# Altium PCB 自平衡小车PCB.PcbDoc
Units mm, origin at the board's own origin, x right, y up, seen from the top; angles counter-clockwise.
Board outline 79.99 x 66.7 mm, 2 copper layers (Top Layer, Bottom Layer); 51 components, 52 nets, 216 pads, 43 vias.
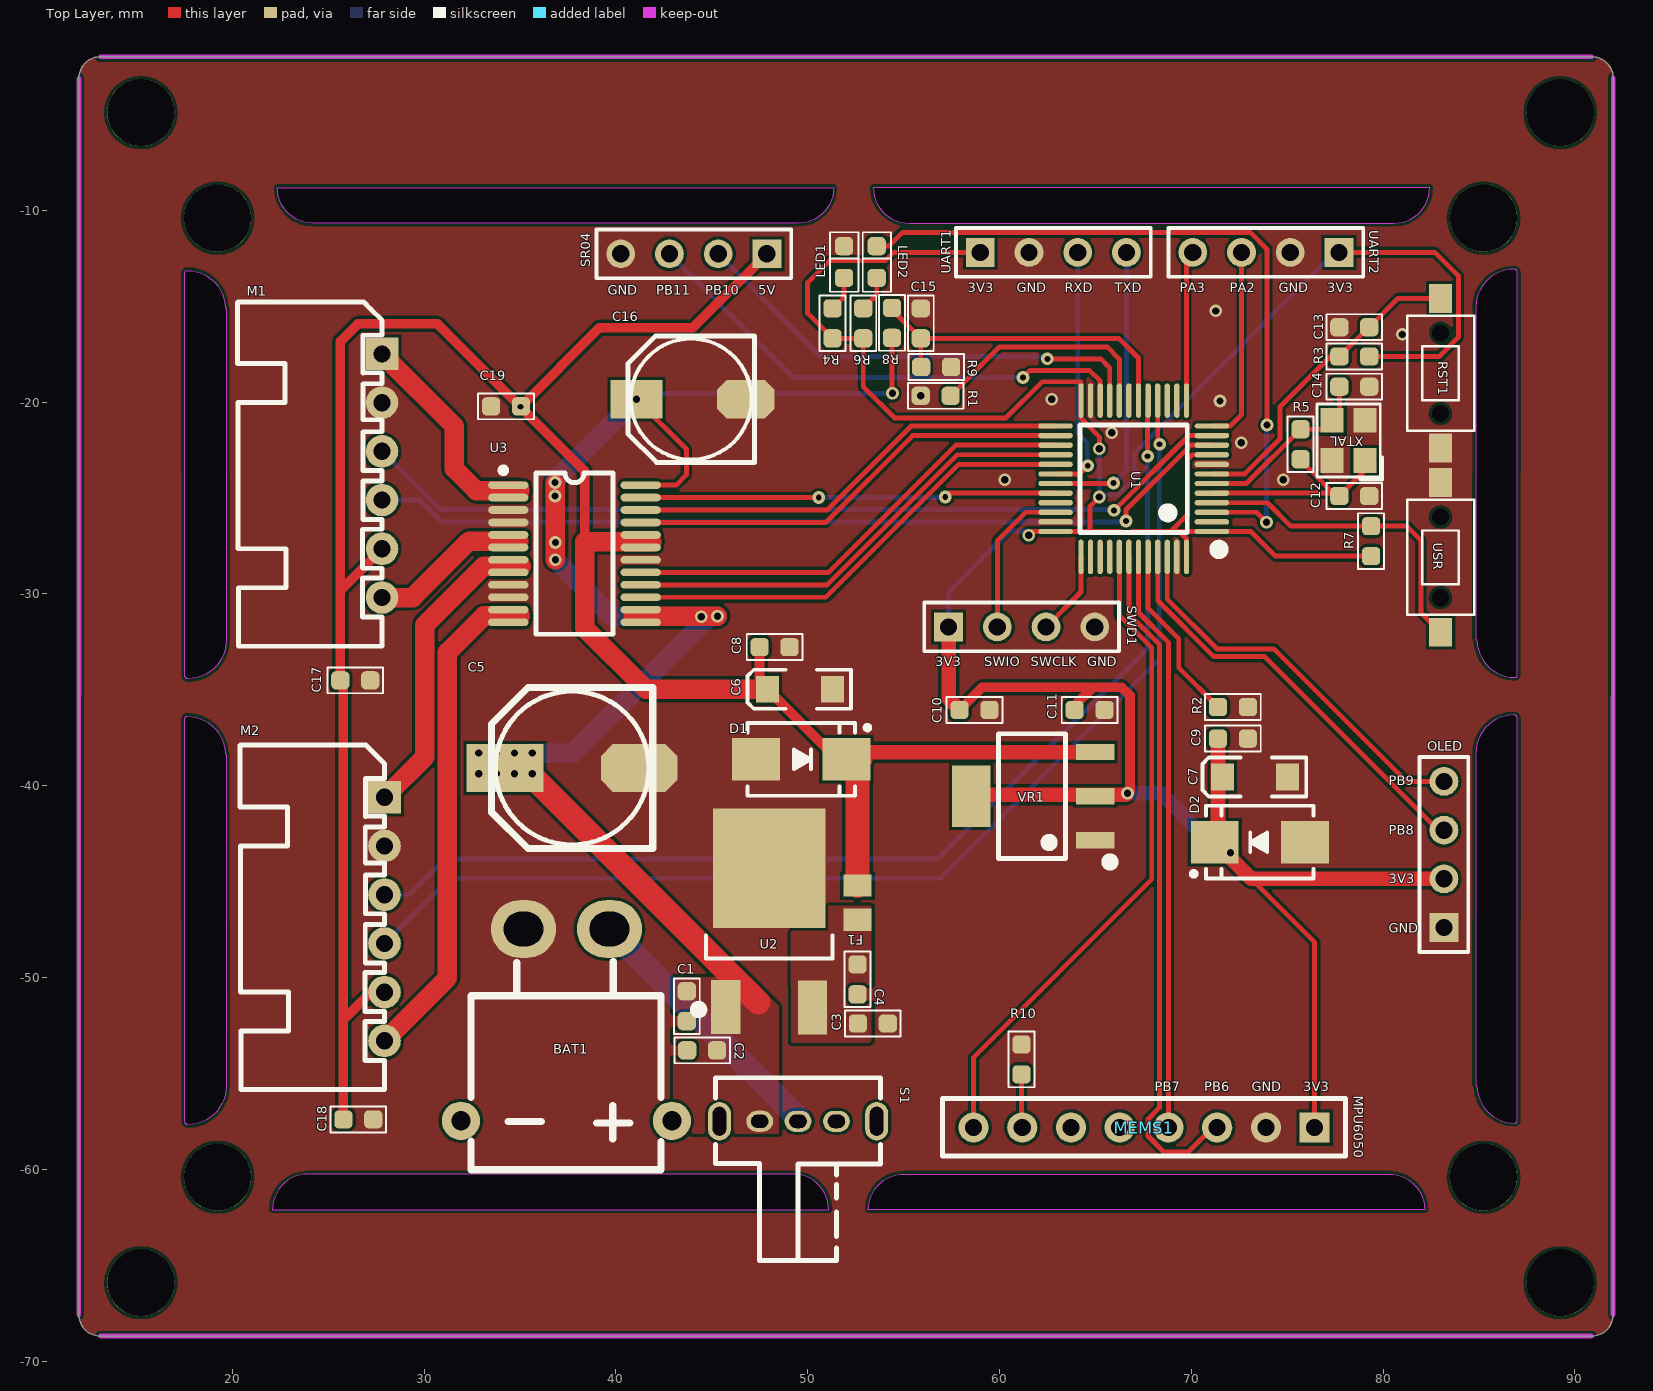
[diagram p0: Top Layer view]
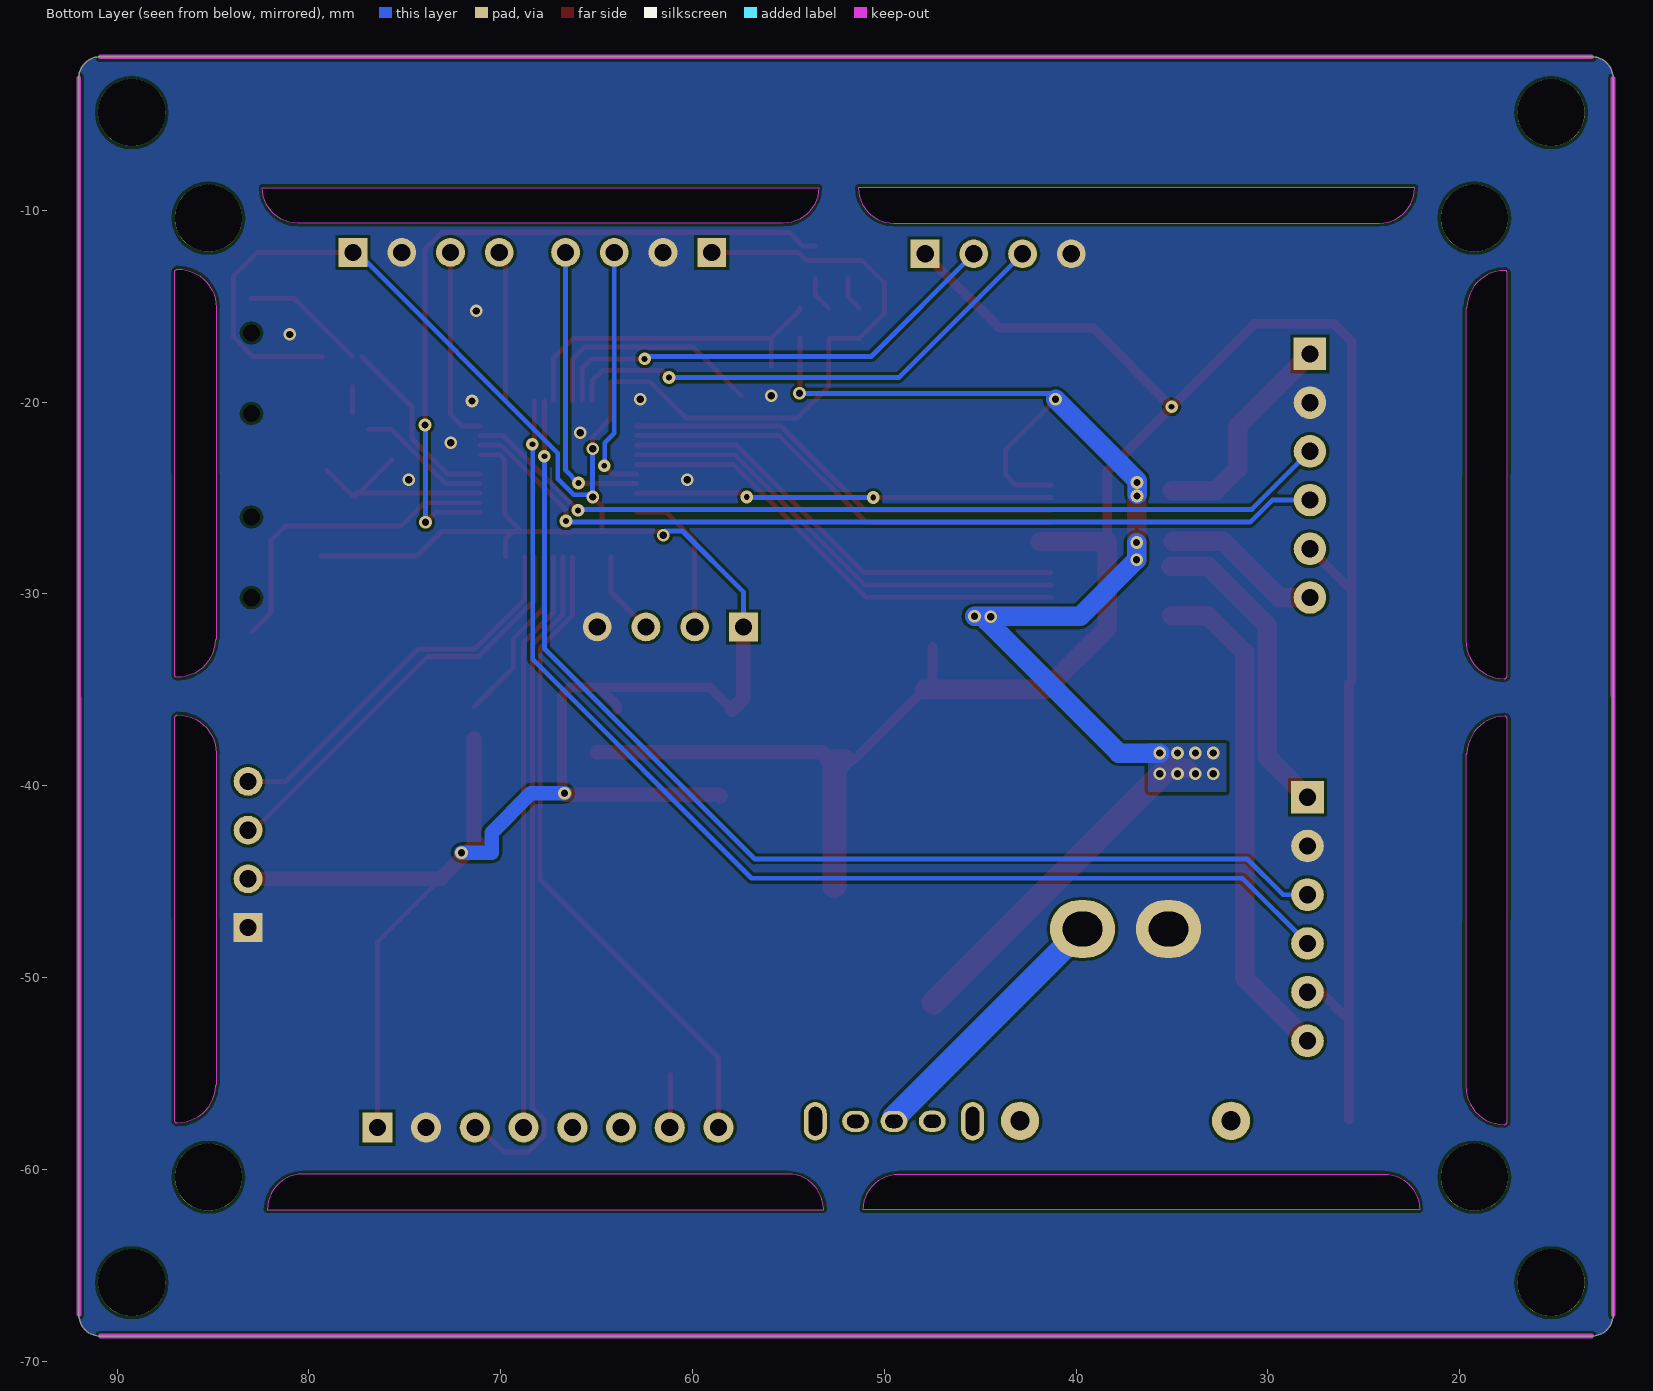
[diagram p1: Bottom Layer view, seen from below]
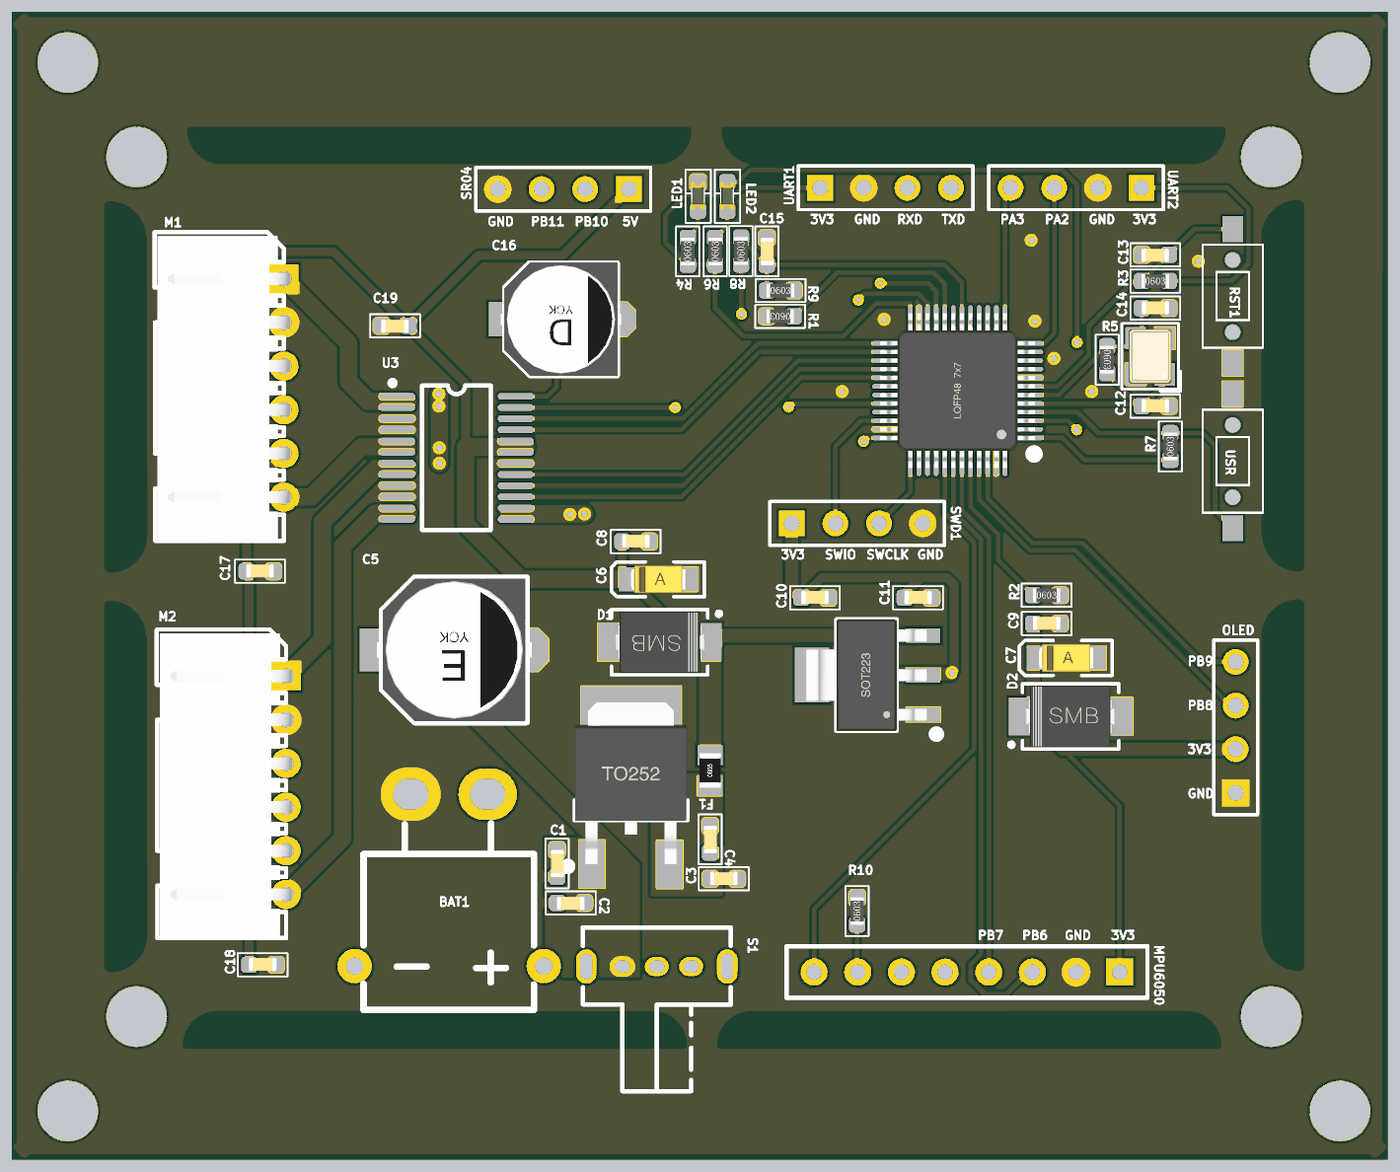
[diagram p2: 3D render of the assembled board from above, using the file's embedded part models]

## Layer stack, top to bottom
Top Solder: solder mask 0.0102, Solder Resist, Dk 3.5
Top Layer: signal copper 0.0356
Dielectric 1: dielectric 0.32, FR-4, Dk 4.8
Bottom Layer: signal copper 0.0356
Bottom Solder: solder mask 0.0102, Solder Resist, Dk 3.5

## Board outline
12.007,-67.582 ccw(c13.125,-67.582) 13.125,-68.7 90.875,-68.7 ccw(c90.875,-67.582) 91.993,-67.582 92,-3.1 92,-3.118 ccw(c90.882,-3.118) 90.882,-2 13.125,-2 ccw(c13.125,-3.118) 12.007,-3.118
cut-out: 22.098,-62.103 51.098,-62.103 ccw(c49.25,-62.103) 49.25,-60.255 23.946,-60.255 ccw(c23.946,-62.103)
cut-out: 53.173,-62.103 cw(c55.021,-62.103) 55.021,-60.255 80.325,-60.255 cw(c80.325,-62.103) 82.173,-62.103
cut-out: 84.831,-32.318 ccw(c84.959,-32.318) 84.893,-32.427 ccw(c86.868,-32.379) 86.868,-34.354 ccw(c86.868,-34.227) 86.995,-34.227 86.995,-13.227 ccw(c86.868,-13.227) 86.942,-13.123 ccw(c86.839,-13.198) 86.839,-13.07 ccw(c86.839,-15.078) 84.831,-15.078
cut-out: 84.831,-55.559 ccw(c84.959,-55.559) 84.893,-55.668 ccw(c86.868,-55.62) 86.868,-57.595 ccw(c86.868,-57.468) 86.995,-57.468 86.995,-36.468 ccw(c86.868,-36.468) 86.942,-36.364 ccw(c86.839,-36.439) 86.839,-36.311 ccw(c86.839,-38.319) 84.831,-38.319
cut-out: 17.579,-34.375 cw(c17.653,-34.271) 17.526,-34.271 17.526,-13.271 cw(c17.653,-13.271) 17.653,-13.144 cw(c17.653,-15.119) 19.628,-15.071 cw(c19.562,-15.18) 19.69,-15.18 19.69,-32.42 cw(c17.682,-32.42) 17.682,-34.428 cw(c17.682,-34.3)
cut-out: 17.579,-57.616 cw(c17.653,-57.512) 17.526,-57.512 17.526,-36.512 cw(c17.653,-36.512) 17.653,-36.385 cw(c17.653,-38.36) 19.628,-38.312 cw(c19.562,-38.421) 19.69,-38.421 19.69,-55.661 cw(c17.682,-55.661) 17.682,-57.669 cw(c17.682,-57.541)
cut-out: 53.427,-8.822 ccw(c55.275,-8.822) 55.275,-10.67 80.579,-10.67 ccw(c80.579,-8.822) 82.427,-8.822
cut-out: 24.2,-10.67 cw(c24.2,-8.822) 22.352,-8.822 51.352,-8.822 cw(c49.504,-8.822) 49.504,-10.67

## Design rules (kind name [scope] priority, off if disabled: settings)
Clearance [All] p1: gap=0.152
ComponentClearance [All] p1: gap=0.02 collisioncheckmode=3 verticalgap=0.254 showdistances=TRUE
HoleSize [All] p1: absolutevalues=TRUE maxlimit=20 minlimit=0.152 maxpercent=80.000 minpercent=20.000
HoleToHoleClearance [All] p1: gap=0.152 allowstackedmicrovias=TRUE
MinimumSolderMaskSliver [All] p1: minsoldermaskwidth=0.01
PlaneClearance [All] p1: clearance=0.152
PlaneConnect [All] p1: planeconnectstyle=Direct reliefexpansion=0.508 reliefentries=4 reliefconductorwidth=0.508 reliefairgap=0.254
PolygonConnect [All] p1: connectstyle=Direct reliefconductorwidth=0.508 reliefentries=4 polygonreliefangle="45 Angle" airgapwidth=0.254
RoutingVias [All] p1: holewidth=0.3 width=0.45 viastyle="Through Hole" minholewidth=0.3 minwidth=0.45 maxholewidth=20 maxwidth=30
SilkToBoardRegionClearance [All] p1 off:
SilkToSilkClearance [All] p1: silktosilkclearance=0.05
SilkToSolderMaskClearance [IsPad] p1: minsilkscreentomaskgap=0 clearancetoexposedcopper=FALSE
SolderMaskExpansion [All] p1: expansion=0.05
Width [All] p1: maxlimit=12.7 minlimit=0.152 preferedwidth=0.254
21 further rules are at their usual default settings.

## Components (designator, comment, footprint, x,y, rotation, side; value= is the part's Value field where it differs from the comment)
BAT1 "Header 2" XT30-PW-M 37.425,-47.475 r180 top
C1 "22uF" 0603_C_f 43.7,-51.5 r90 top
C2 "334" 0603_C_f 44.5,-53.8 r0 top
C3 "104" 0603_C_f 53.4,-52.4 r180 top
C4 "22uF" 0603_C_f 52.6,-50.1 r90 top
C5 "220uF 35V" "CM E(8*10.2)" 37.719,-39.082 r180 top
C6 "T22uF" "CD A(3216)" 49.6,-34.975 r0 top
C7 "T22uF" "CD A(3216)" 73.325,-39.55 r0 top
C8 "104" 0603_C_f 48.275,-32.775 r180 top
C9 "104" 0603_C_f 72.175,-37.55 r180 top
C10 "104" 0603_C_f 58.7,-36.05 r180 top
C11 "104" 0603_C_f 64.7,-36.05 r180 top
C12 "22pF" 0603_C_f 78.5,-24.9 r180 top
C13 "104" 0603_C_f 78.5,-16.1 r0 top
C14 "22pF" 0603_C_f 78.5,-19.2 r180 top
C15 "104" 0603_C_f 55.9,-15.9 r90 top
C16 "47uF" "CM D(6.3*7.7)" 43.925,-19.85 r180 top
C17 "104" 0603_C_f 26.416,-34.51 r180 top
C18 "104" 0603_C_f 26.575,-57.4 r180 top
C19 "104" 0603_C_f 34.275,-20.225 r0 top
D1 "KE" SMB 49.665,-38.629 r0 top
D2 "KC" SMB 73.575,-42.95 r180 top
F1 "F1" 0805_R 52.6,-46.1 r90 top
LED1 "LED" LED-0603_GREEN 51.9,-13.5 r90 top
LED2 "LED" LED-0603_GREEN 53.6,-13.5 r90 top
M1 "Header 6" XH2.54-WI-6P 27.813,-23.842 r270 top
M2 "Header 6" XH2.54-WI-6P 27.94,-46.956 r270 top
MEMS1 "MPU6050" MPU6050 58.65,-57.825 r270 top
OLED "Header 4" HDR1X4 83.175,-47.4 r90 top
R1 "10K" 0603_R_F 56.675,-19.675 r180 top
R2 "10K" 0603_R_F 72.175,-35.9 r0 top
R3 "10K" 0603_R_F 78.5,-17.625 r0 top
R4 "1K" 0603_R_F 51.3,-15.9 r90 top
R5 "1M" 0603_R_F 75.7,-22.2 r270 top
R6 "1K" 0603_R_F 52.9,-15.9 r90 top
R7 "10K" 0603_R_F 79.375,-27.25 r90 top
R8 "10K" 0603_R_F 54.4,-15.875 r90 top
R9 "1K" 0603_R_F 56.7,-18.175 r0 top
R10 "10K" 0603_R_F 61.15,-54.275 r90 top
RST1 "SW-PB" KEY 83,-18.5 r270 top
S1 "SW-SPDT" SW-TH_SK-12D02-VG5 49.5,-57.5 r0 top
SR04 "Header 4" HDR1X4 47.875,-12.275 r180 top
SWD1 "Header 4" HDR1X4 57.35,-31.725 r0 top
U1 "STM32F103C8T6" "LQFP48 7X7_N" 67,-24 r90 top
U2 "78L05" TO252 48,-48.5 r0 top
U3 "TB6612FNG" SSOP-24_208mil 37.846,-27.906 r270 top
UART1 "Header 4" HDR1X4 59,-12.2 r0 top
UART2 "Header 4" HDR1X4 77.7,-12.2 r180 top
USR "SW-PB" KEY 83,-28.1 r90 top
VR1 "AMS1117-3.3" SOT223_N 61.7,-40.55 r90 top
XTAL "XTAL-4P" "OSC 3225-4P" 78.2,-22 r90 top

## Footprints (in the part's own frame and the unit in brackets; to place one, negate y for a bottom-side part, rotate by r counter-clockwise, add the part's x,y. Pads: shape width x height; smd on the part's side, far side on the other; paste and mask are expansions set on the pad)
0603_C_f [mm]
  rrect50% 0.95x0.95 smd: 1(-0.78,0) 2(0.78,0)
  silkscreen extent -1.45,-0.67 1.45,0.67, body extent -0.82,-0.42 0.8,0.38, height 0.8
0603_R_F [mm]
  rrect50% 0.95x0.95 smd: 1(-0.78,0) 2(0.78,0)
  silkscreen extent -1.45,-0.67 1.45,0.67, body extent -0.8,-0.4 0.8,0.4, height 0.45
0805_R [mm]
  rect 1.16x1.47 smd: 1(-0.89,0) 2(0.89,0)
  body extent -1,-0.62 1,0.63, height 0.49
"CD A(3216)" [mm] "长3.2mm，宽1.6mm，厚1.6mm"
  rect 1.2x1.4 smd: 1(-1.7,0) 2(1.7,0)
  silkscreen extent -2.74,-1.02 2.67,1.02, body extent -1.6,-0.8 1.6,0.8, height 1.6
"CM D(6.3*7.7)" [mm] "贴片电解电容，直径6.3mm，高7.7mm"
  rect 2.7x2 smd: 1(2.85,0)
  oct 3x2 smd: 2(-2.85,0)
  silkscreen extent -3.3,-3.3 3.3,3.3, body extent -3.5,-3.3 3.5,3.3, height 7.7
"CM E(8*10.2)" [mm] "贴片电解电容，直径8mm，高10.2mm"
  rect 4x2.5 smd: 1(3.5,0)
  oct 4x2.5 smd: 2(-3.5,0)
  silkscreen extent -4.2,-4.2 4.2,4.2, body extent -4.5,-4.15 4.5,4.15, height 10.2
HDR1X4 [mm] "Connector; Header; 4 Position"
  rect 1.5x1.5 hole 0.9: 1(0,0)
  round 1.5 hole 0.9: 2(2.54,0) 3(5.08,0) 4(7.62,0)
  silkscreen extent -1.27,-1.27 8.89,1.27
KEY [mm]
  round 0 hole 0.9: 0(-2.1,0) 0(2.1,0)
  rect 1.5x1.2 smd: 1(-3.9,0) 2(3.9,0)
  silkscreen extent -3,-1.75 3,1.75
LED-0603_GREEN [mm]
  rrect50% 0.95x0.95 smd: 1(-0.03,0) 2(1.625,0)
  silkscreen extent -0.75,-0.75 2.35,0.72, body extent 0.02,-0.4 1.63,0.4, height 0.6
"LQFP48 7X7_N" [mm] "48脚，体宽7x7mm，脚距0.5mm"
  oval 0.279x1.8 smd: 1(-2.75,-4.075) 2(-2.25,-4.075) 3(-1.75,-4.075) 4(-1.25,-4.075) 5(-0.75,-4.075) 6(-0.25,-4.075) 7(0.25,-4.075) 8(0.75,-4.075) 9(1.25,-4.075) 10(1.75,-4.075) 11(2.25,-4.075) 12(2.75,-4.075) 25(2.75,4.075) 26(2.25,4.075) 27(1.75,4.075) 28(1.25,4.075) 29(0.75,4.075) 30(0.25,4.075) 31(-0.25,4.075) 32(-0.75,4.075) 33(-1.25,4.075) 34(-1.75,4.075) 35(-2.25,4.075) 36(-2.75,4.075)
  oval 1.8x0.279 smd: 13(4.075,-2.75) 14(4.075,-2.25) 15(4.075,-1.75) 16(4.075,-1.25) 17(4.075,-0.75) 18(4.075,-0.25) 19(4.075,0.25) 20(4.075,0.75) 21(4.075,1.25) 22(4.075,1.75) 23(4.075,2.25) 24(4.075,2.75) 37(-4.075,2.75) 38(-4.075,2.25) 39(-4.075,1.75) 40(-4.075,1.25) 41(-4.075,0.75) 42(-4.075,0.25) 43(-4.075,-0.25) 44(-4.075,-0.75) 45(-4.075,-1.25) 46(-4.075,-1.75) 47(-4.075,-2.25) 48(-4.075,-2.75)
  silkscreen extent -3.93,-4.69 2.79,2.79, body extent -4.5,-4.5 4.5,4.5, height 1.45
MPU6050 [mil]
  rect 62x62 hole 35: 1(0,700)
  round 62 hole 35: 2(0,600) 3(0,500) 4(0,400) 5(0,300) 6(0,200) 7(0,100) 8(0,0)
  silkscreen extent -59,-63 59,763
"OSC 3225-4P" [mm] "3.2*2.5*0.7mm(长宽高)"
  rect 1.3x1.2 smd: 1(-1.05,-0.85) 2(1.05,-0.85) 3(1.05,0.85) 4(-1.05,0.85)
  silkscreen extent -2.03,-1.75 1.91,1.65, body extent -1.6,-1.25 1.6,1.25, height 0.7
SMB [mm] "4.7*3.9*2.2mm(长宽高，不包括引脚）"
  rect 2.5x2.2 smd: 1(-2.35,0) 2(2.35,0)
  silkscreen extent -2.8,-1.9 3.58,1.9, body extent -2.63,-1.8 2.67,1.8, height 2.35
SOT223_N [mm] "6.4x7x1.6mm(长宽高)"
  rect 0.85x2 smd: 1(-2.3,-3.302) 2(0,-3.302) 3(2.3,-3.302)
  rect 3.2x2 smd: 2(0,3.175)
  silkscreen extent -3.63,-4.26 3.25,1.75, body extent -3.25,-3.51 3.25,3.51, height 1.65
SSOP-24_208mil [mm]
  oval 0.4x2.1 smd mask+0.051: 1(-3.575,-3.45) 2(-2.925,-3.45) 3(-2.275,-3.45) 4(-1.625,-3.45) 5(-0.975,-3.45) 6(-0.325,-3.45) 7(0.325,-3.45) 8(0.975,-3.45) 9(1.625,-3.45) 10(2.275,-3.45) 11(2.925,-3.45) 12(3.575,-3.45) 13(3.575,3.45) 14(2.925,3.45) 15(2.275,3.45) 16(1.625,3.45) 17(0.975,3.45) 18(0.325,3.45) 19(-0.325,3.45) 20(-0.975,3.45) 21(-1.625,3.45) 22(-2.275,3.45) 23(-2.925,3.45) 24(-3.575,3.45)
  silkscreen extent -4.5,-3.86 4.2,2
SW-TH_SK-12D02-VG5 [mm]
  oval 1.4x1.1 hole 0.7 slot 0.9 at 0 deg: 1(-2,0.001) 2(0,0) 3(2,-0.001)
  oval 1.2x2 hole 0.7 slot 1.5 at 90 deg: 4(4.1,0) 5(-4.1,0)
  silkscreen extent -4.3,-7.25 4.3,2.27
TO252 [mil] "252晶体管"
  rect 60x110 smd: 1(-89.55,-119.77) 3(88.45,-120.77)
  rect 230x245 smd: 2(0,165.35)
  silkscreen extent -153,-133 130,28, body extent -128,-120 128,251, height 91
XH2.54-WI-6P [mm] "接插件，6P"
  rect 1.7x1.7 hole 0.9: 1(-6.35,0)
  round 1.7 hole 0.9: 2(-3.81,0) 3(-1.27,0) 4(1.27,0) 5(3.81,0) 6(6.35,0)
  silkscreen extent -9.07,-7.53 8.89,0, body extent -8.85,-7.35 8.85,0.35, height 5.75
XT30-PW-M [mm]
  round 2 hole 1: 0(-5.5,10) 0(5.5,10)
  oval 3.4x3 hole 1.8 slot 2.06 at 0 deg: 1(-2.24,0) 2(2.24,0)
  silkscreen extent -4.93,1.7 4.98,12.55, body extent -4.91,-0.11 5.07,12.6, height 5.3

## Part data
BAT1: "Header, 2-Pin"
C1 C4: library part "0805 22uF (226) 20% 25V", "贴片电容"
C2: library part "0603 100nF (104) 10% 50V_1", "贴片电容"
C3 C8 C9 C10 C11 C13 C15 C17 C18 C19: library part "0603 100nF (104) 10% 50V", "贴片电容"
C5: library part "Cap Pol1_1", "Polarized Capacitor (Radial)"
C6 C7: library part "Cap Pol1_2", "Polarized Capacitor (Radial)"
C12 C14: library part "0603 22pF (220) 5% 50V", "贴片电容"
C16: library part "Cap Pol1", "Polarized Capacitor (Radial)"
D1: library part Diode_1, "Default Diode"
D2: library part Diode_2, "Default Diode"
F1: library part "Fuse 2", "Fuse"
M1 M2: "Header, 6-Pin"
MEMS1: library part GY-521
OLED SR04 UART1 UART2: library part "Header 4_1", "Header, 4-Pin"
R1 R2 R3 R7 R8 R10: library part "0603 10KΩ (1002) 1%", "贴片电阻"
R4 R6 R9: library part "0603 1KΩ (1001) 1%", "贴片电阻"
R5: library part "0603 1MΩ (1004) 1%", "贴片电阻"
RST1 USR: "Switch"
S1: "SPDT Subminiature Toggle Switch, Right Angle Mounting, Vertical Actuation"
SWD1: "Header, 4-Pin"
U1: "ARM"
U2: "3-Terminal Positive Voltage Regulator"
VR1: library part "SOT-223 AMS1117-3.3", "低压差线性稳压(LDO)"

## Free pads (board coordinates)
  round 3.5 hole 3.5: ""(15.24,-65.913) ""(15.24,-4.913) ""(19.24,-60.413) ""(19.24,-10.413) ""(85.24,-60.413) ""(85.24,-10.413) ""(89.24,-65.913) ""(89.24,-4.913)

## Via types
v1: diameter 0.66, hole 0.381, Top Layer to Bottom Layer, 32 vias
v2: diameter 0.66, hole 0.305, Top Layer to Bottom Layer, 11 vias

## Nets (pads, with @x,y where several pads share a name; then routed paths per layer and width w, separated by ;. In a path a pad name is that pad's centre, name@x,y a point inside that pad or via, vN(x,y) a via of type N, cw(c..) or ccw(c..) an arc to the next point about the centre after c; other vN are vias at no path point)
3V3: C7.1 C9.2 C10.2 C11.2 D2.2 MEMS1.1 OLED.2 R3.2 R4.1 R6.1 R7.1 SWD1.1 U1.1 U1.9 U1.24 U1.36 U1.48 UART1.1 UART2.1 VR1.2 | length 173.1
  Top Layer w0.254: UART1.1 54.481,-12.2 54.052,-12.629 51.146,-12.629 50,-13.775 50,-15.38 R4.1 R6.1 52.9,-19.2 54.527,-20.827 60.342,-20.827 62.228,-18.941 64.25,-18.941 U1.24 64.25,-20.85 65.21,-21.81 v1(65.21,-22.44) ; v1(61.525,-26.95) 61.725,-26.75 U1.36 64.725,-26.75 ; v1(65.2,-24.95) 64.725,-25.425 64.725,-26.75 ; U1.48 69.75,-27.125 69.375,-26.75 ; U1.9 70.052,-22.75 69.8,-23.002 69.8,-25.875 68.925,-26.75 ; 73.135,-44.86 76.43,-48.155 MEMS1.1 ; UART2.1 82.7,-12.2 83.925,-13.425 83.925,-16.625 82.925,-17.625 R3.2 ; R7.1 74.38,-28.03 73.1,-26.75 U1.1 69.375,-26.75 ; 64.725,-26.75 66.288,-26.75 66.347,-26.81 66.853,-26.81 66.912,-26.75 68.925,-26.75 ; 68.925,-26.75 69.375,-26.75
  Top Layer w0.508: C10.2 59.095,-34.875 64.675,-34.875 ; C11.2 63.92,-35.83 64.875,-34.875 66.375,-34.875 66.8,-35.3 66.8,-40.275 v1@66.6,-40.475
  Top Layer w0.762: SWD1.1 57.35,-35.48 C10.2 ; VR1.2@58.525,-40.55 58.6,-40.475 v1@66.6,-40.475 ; D2.2 73.135,-44.86 OLED.2 ; D2.2@71.395,-42.78 C9.2
  Bottom Layer w0.254: SWD1.1 57.35,-29.9 60.525,-26.725 v1@61.425,-26.725 ; v1(65.2,-24.95) v1@65.21,-24.94 ; v1(65.21,-22.44) v1@65.21,-24.94 ; UART2.1 77.488,-12.2 67.026,-22.661 67.026,-24.011 66.203,-24.835 65.315,-24.835 v1@65.21,-24.94
  Bottom Layer w0.762: v1(66.675,-40.4) 68.425,-40.4 70.475,-42.45 70.475,-43.5 v1(72.05,-43.5)
5V: C6.1 C8.2 C17.2 C18.2 C19.2 D1.2 F1.2 M1.5 M2.5 SR04.1 U3.19 U3.20 VR1.3 | length 128.9
  Top Layer w0.508: C17.2 25.636,-29.829 ; C18.2 C17.2@25.795,-34.669 ; 25.945,-52.05 27.229,-50.766 M2.5 ; M1.5 25.636,-29.829 ; 38.375,-27.275 38.375,-23.6 v2(35.025,-20.25) ; C8.2 47.495,-34.57 C6.1 51.554,-38.629 D1.2 ; SR04.1 44.025,-16.125 39.15,-16.125 v2(35.025,-20.25) ; 25.636,-29.829 25.636,-16.839 26.55,-15.925 30.7,-15.925 v2(35.025,-20.25)
  Top Layer w0.762: D1.2@52.871,-38.629 53.25,-38.25 VR1.3
  Top Layer w1.016: 41.875,-27.275 38.375,-27.275 38.375,-31.775 41.575,-34.975 C6.1 ; D1.2@52.6,-39.214 D1.2 D1.2@52.871,-38.629
  Top Layer w1.27: F1.2 D1.2@52.6,-39.214
12V: C1.2 C2.2 C5.1 C16.1 R8.1 S1.1 U2.1 U3.13 U3.14 U3.24 | length 79.8
  Top Layer w0.254: v1(41.075,-19.85) 43.675,-22.45 43.675,-23.8 43.144,-24.331 U3.24 ; v1@54.4,-19.525 R8.1
  Top Layer w1.016: C5.1 C5.1@35.207,-39.082 ; v1(36.85,-28.225) v1@36.85,-24.25 ; 40.9,-31.175 v1(45.3,-31.175)
  Top Layer w1.27: C5.1@35.207,-39.082 47.431,-51.306
  Bottom Layer w0.254: v1(41.075,-19.85) 41.375,-19.55 v1(54.425,-19.55)
  Bottom Layer w0.508: v1(36.825,-24.2) v1@36.825,-24.1
  Bottom Layer w1.016: v1(35.65,-38.3) 37.775,-38.3 v1@44.65,-31.425 ; v1@36.825,-24.813 v1(36.825,-24.2) ; v1@36.825,-24.1 v1(41.075,-19.85) ; v1(36.85,-27.325) v1(36.85,-28.225) 39.8,-31.175 v1(45.3,-31.175)
  other v1: 32.85,-39.375 33.783,-39.375 34.717,-39.375 35.65,-39.375 32.85,-38.3 33.783,-38.3 34.717,-38.3 44.45,-31.2 36.825,-24.9
A01: M1.1 U3.1 U3.2 | length 11.4
  Top Layer w1.016: M1.1 31.575,-21.254 31.575,-23.475 32.725,-24.625 35,-24.625
A02: M1.6 U3.5 U3.6 | length 8.4
  Top Layer w1.016: M1.6 29.408,-30.192 32.35,-27.25 34.95,-27.25
B01: M2.6 U3.11 U3.12 | length 26.2
  Top Layer w1.016: M2.6 31.218,-50.028 31.218,-33.057 33.125,-31.15 35.025,-31.15
B02: M2.1 U3.7 U3.8 | length 16.2
  Top Layer w1.016: M2.1 30.05,-38.496 30.05,-31.625 33.125,-28.55 35.075,-28.55
BAT+: BAT1.1 S1.2 | length 13.9
  Bottom Layer w1.27: BAT1.1 S1.2@49.5,-57.31
BOOT: R1.1 U1.20 | length 12.3
  Top Layer w0.254: R1.1 60.005,-17.125 65.614,-17.125 66.25,-17.761 U1.20
BOOT0: R2.1 U1.44 | length 9.3
  Top Layer w0.254: U1.44 67.75,-30.75 69.35,-32.35 69.35,-33.855 R2.1
GND: BAT1.2 C1.1 C2.1 C3.1 C4.1 C5.2 C6.2 C7.2 C8.1 C9.1 C10.1 C11.1 C12.1 C13.1 C14.1 C15.2 C16.2 C17.1 C18.1 C19.1 D1.1 D2.1 LED1.2 M1.2 M2.2 MEMS1.2 OLED.1 R1.2 R2.2 R9.2 R10.2 RST1.2 SR04.4 SWD1.4 U1.8 U1.23 U1.35 U1.47 U2.2 U3.3 U3.4 U3.9 U3.10 U3.18 UART1.2 UART2.2 USR.2 VR1.1 XTAL.2 XTAL.4
  other v1: 60.275,-24.05 74.8,-24.05 72.6,-22.125 65.85,-21.6 71.5,-19.95 62.725,-19.85 55.895,-19.675 81,-16.475 71.275,-15.25
KEY1: R7.2 U1.4 USR.1 | length 16.9
  Top Layer w0.254: U1.4 73.975,-25.25 75.195,-26.47 R7.2 81.245,-26.47 81.975,-27.2 81.975,-30.975 USR.1
LED1: LED2.2 U1.3 | length 38.3
  Top Layer w0.254: LED2.2 54.231,-11.875 54.936,-11.171 73.096,-11.171 73.95,-12.025 v1(73.95,-21.2) ; U1.3 73.4,-25.75 v1(73.925,-26.275)
  Bottom Layer w0.254: v1(73.925,-26.275) 73.925,-21.225 v1(73.95,-21.2)
NetLED1_1: LED1.1 R4.2 | length 1.8
  Top Layer w0.254: R4.2 51.9,-14.52 LED1.1
NetLED2_1: LED2.1 R6.2 | length 1.9
  Top Layer w0.254: R6.2 53.6,-14.42 LED2.1
NetMEMS1_7: MEMS1.7 R10.1 | length 2.8
  Top Layer w0.254: R10.1 61.15,-57.785 MEMS1.7
NRST: C13.2 R3.1 RST1.1 U1.7 | length 16.2
  Top Layer w0.254: U1.7 72.795,-23.75 74.625,-21.92 74.625,-20.25 R3.1@77.25,-17.625 ; R3.1 79.245,-16.1 C13.2 80.78,-14.6 RST1.1
OSC_IN: C12.2 R5.2 U1.5 XTAL.1 | length 11.2
  Top Layer w0.254: U1.5 C12.2@77.405,-24.75 ; R5.2 75.7,-23.045 C12.2@77.405,-24.75 ; C12.2@77.57,-24.75 C12.2@77.405,-24.75 ; XTAL.1@79.05,-23.57 C12.2 77.555,-24.9 C12.2@77.405,-24.75
OSC_OUT: C14.2 R5.1 U1.6 XTAL.3 | length 8.4
  Top Layer w0.254: U1.6 72.87,-24.25 R5.1 XTAL.3@76.88,-21.42 ; XTAL.3@77.72,-20.58 C14.2
PA0: M1.4 U1.10 | length 45.3
  Top Layer w0.254: v2(66.6,-26.2) 66.6,-25.627 69.977,-22.25 U1.10
  Bottom Layer w0.254: M1.4 29.778,-25.112 30.926,-26.26 66.228,-26.26
PA1: M1.3 U1.11 | length 46.1
  Top Layer w0.254: v2(65.975,-25.65) 69.881,-21.744 71.069,-21.744 U1.11
  Bottom Layer w0.254: M1.3 30.841,-25.6 v2@65.925,-25.6
PA2: U1.12 UART2.3 | length 10.2
  Top Layer w0.254: U1.12 72.025,-21.25 72.62,-20.655 UART2.3
PA3: U1.13 UART2.4 | length 7.4
  Top Layer w0.254: U1.13 UART2.4@69.75,-12.53
PA4: U1.14
PA5: U1.15
PA6: M2.4 U1.16 | length 59.8
  Top Layer w0.254: v2@68.25,-22.1 U1.16
  Bottom Layer w0.254: M2.4 31.341,-44.825 56.925,-44.825 68.335,-33.415 68.335,-22.488 v2@68.25,-22.403
  other v2: 68.35,-22.2
PA7: M2.3 U1.17 | length 58
  Top Layer w0.254: v2(67.725,-22.825) U1.17@67.725,-19.95
  Bottom Layer w0.254: M2.3 29.214,-45.686 31.075,-43.825 56.75,-43.825 67.725,-32.85 v2(67.725,-22.825)
PA8: U1.29 U3.15 | length 24.5
  Top Layer w0.254: U3.15 50.944,-30.181 57.875,-23.25 U1.29
PA11: U1.32 U3.23 | length 21.7
  Top Layer w0.254: U3.23 v2(50.581,-24.981) ; v2(57.175,-24.95) 57.375,-24.75 U1.32
  Bottom Layer w0.254: v2(50.581,-24.981) 57.156,-24.981 v2@57.175,-24.981
PA12: U1.33
PA15: U1.38
PB0: C15.1 R8.2 R9.1 U1.18 | length 17.7
  Top Layer w0.254: R8.2 54.4,-15.18 C15.1 ; R9.1@55.9,-18.155 C15.1 ; U1.18 67.25,-17.705 66.225,-16.68 C15.1
PB1: U1.19
PB3: U1.39
PB4: U1.40
PB5: MEMS1.8 U1.41 | length 34.3
  Top Layer w0.254: MEMS1.8 58.65,-54.169 67.944,-44.875 67.944,-32.818 66.25,-31.124 U1.41
PB6: MEMS1.3 U1.42 | length 35.6
  Top Layer w0.254: U1.42 66.75,-31.05 68.35,-32.65 68.35,-56.776 67.743,-57.383 67.743,-58.267 68.576,-59.1 69.85,-59.1 71.125,-57.825 MEMS1.3
PB7: MEMS1.4 U1.43 | length 30.4
  Top Layer w0.254: U1.43 67.25,-30.975 68.81,-32.535 MEMS1.4
PB8: OLED.3 U1.45 | length 22.2
  Top Layer w0.254: U1.45 68.25,-30.35 71.175,-33.275 73.825,-33.275 82.87,-42.32 OLED.3
PB9: OLED.4 U1.46 | length 20.6
  Top Layer w0.254: U1.46 68.75,-30.275 71.343,-32.869 74.298,-32.869 81.21,-39.78 OLED.4
PB10: SR04.2 U1.21 | length 24.5
  Top Layer w0.254: v2(62.5,-17.75) 65.275,-17.75 65.75,-18.225 U1.21
  Bottom Layer w0.254: SR04.2 50.685,-17.625 v2@62.5,-17.625
PB11: SR04.3 U1.22 | length 26.5
  Top Layer w0.254: v2(61.225,-18.725) 61.59,-18.36 64.71,-18.36 65.25,-18.9 U1.22
  Bottom Layer w0.254: SR04.3 49.245,-18.725 v2(61.225,-18.725)
PB12: U1.25 U3.22 | length 23.4
  Top Layer w0.254: U3.22 51.019,-25.631 55.4,-21.25 U1.25
PB13: U1.26 U3.21 | length 23.5
  Top Layer w0.254: U3.21 50.944,-26.281 55.475,-21.75 U1.26
PB14: U1.27 U3.17 | length 24.4
  Top Layer w0.254: U3.17 51.095,-28.881 57.726,-22.25 U1.27
PB15: U1.28 U3.16 | length 24.4
  Top Layer w0.254: U3.16 51.019,-29.531 57.8,-22.75 U1.28
PC13: U1.2
RXD: U1.30 UART1.3 | length 13.1
  Top Layer w0.254: U1.30 64.075,-23.75 64.125,-23.8 v2(64.6,-23.325)
  Bottom Layer w0.254: UART1.3@64.08,-12.325 64.08,-21.63 64.575,-22.125 v2@64.575,-23.3
SWCLK: SWD1.3 U1.37 | length 4.4
  Top Layer w0.254: SWD1.3 64.25,-29.905 U1.37
SWIO: SWD1.2 U1.34 | length 8.1
  Top Layer w0.254: SWD1.2 59.89,-27.235 61.375,-25.75 U1.34
TXD: U1.31 UART1.4 | length 15.2
  Top Layer w0.254: U1.31 65.925,-24.25 v2(65.95,-24.225)
  Bottom Layer w0.254: v2@65.975,-24.2 66.62,-23.555 UART1.4@66.62,-12.325
VCC: C3.2 C4.2 F1.1 U2.3
pads on no net: BAT1.0 MEMS1.5 MEMS1.6 RST1.0 S1.3 S1.4 S1.5 USR.0

## Polygon pours and split planes (outlines as drawn)
12V on Top Layer "Top Layer-No Net" (solid, pour order 9): 43,-50 47,-50 48.5,-51.5 48.5,-58.15 43.05,-58.15 43,-58.1 43,-50
VCC on Top Layer "Top Layer-No Net" (solid, pour order 10): 49.125,-46.275 53.325,-46.275 53.325,-46.4 53.325,-53.4 49.175,-53.4 49.15,-53.425
GND on Top Layer "Top Layer-No Net" (solid, remove dead copper, pour order 15): 12.007,-67.582 ccw(c13.125,-67.582) 13.125,-68.7 90.875,-68.7 ccw(c90.875,-67.582) 91.993,-67.582 92,-3.1 92,-3.118 ccw(c90.882,-3.118) 90.882,-2 13.125,-2 ccw(c13.125,-3.118) 12.007,-3.118
12V on Bottom Layer "Top Layer-No Net" (solid, pour order 6): 32.175,-37.775 32.2,-37.8 36.25,-37.8 36.25,-40.275 36.2,-40.325 32.175,-40.325
GND on Bottom Layer "Top Layer-No Net" (solid, remove dead copper, pour order 13): 12.007,-67.582 ccw(c13.125,-67.582) 13.125,-68.7 90.875,-68.7 ccw(c90.875,-67.582) 91.993,-67.582 92,-3.1 92,-3.118 ccw(c90.882,-3.118) 90.882,-2 13.125,-2 ccw(c13.125,-3.118) 12.007,-3.118

## Keep-outs
Keep-Out Layer:
  lines w0.254: 12,-67.582 12.007,-3.118 ; 13.125,-68.7 90.875,-68.7 ; 13.125,-2 90.882,-2 ; 91.993,-67.582 92,-3.1

## Silkscreen, mask and mechanical layers (free items; w line width, h text height)
Top Overlay:
  text "3V3" at 58.35,-14.275 h0.5
  text "GND" at 60.9,-14.275 h0.5
  text "RXD" at 63.4,-14.275 h0.5
  text "TXD" at 66,-14.275 h0.5
  text "PA3" at 69.4,-14.275 h0.5
  text "PA2" at 72,-14.275 h0.5
  text "GND" at 74.55,-14.275 h0.5
  text "3V3" at 77.1,-14.275 h0.5
  text "GND" at 39.575,-14.4 h0.5
  text "PB11" at 42.1,-14.4 h0.5
  text "PB10" at 44.65,-14.4 h0.5
  text "5V" at 47.425,-14.4 h0.5
  text "3V3" at 56.65,-33.775 h0.5
  text "SWIO" at 59.2,-33.775 h0.5
  text "SWCLK" at 61.625,-33.775 h0.5
  text "GND" at 64.575,-33.775 h0.5
  text "PB9" at 80.3,-39.975 h0.5
  text "PB8" at 80.3,-42.55 h0.5
  text "3V3" at 80.3,-45.1 h0.5
  text "GND" at 80.3,-47.675 h0.5
  text "PB7" at 68.1,-55.925 h0.5
  text "PB6" at 70.675,-55.925 h0.5
  text "GND" at 73.15,-55.925 h0.5
  text "3V3" at 75.85,-55.925 h0.5
  text "MPU6050" at 78.475,-56.175 h0.5 r270
Mechanical 1:
  lines w0.254: 12.007,-67.582 ccw(c13.125,-67.582) 13.125,-68.7 ; 12.007,-3.118 cw(c13.125,-3.118) 13.125,-2 ; 17.653,-57.512 17.653,-36.512 cw(c17.653,-38.36) 19.501,-38.36 ; 17.653,-34.271 17.653,-13.271 cw(c17.653,-15.119) 19.501,-15.119 ; 17.682,-57.541 ccw(c17.682,-55.661) 19.562,-55.661 19.562,-38.421 ; 17.682,-34.3 ccw(c17.682,-32.42) 19.562,-32.42 19.562,-15.18 ; 84.959,-55.559 84.959,-38.319 cw(c86.839,-38.319) 86.839,-36.439 ; 84.959,-32.318 84.959,-15.078 cw(c86.839,-15.078) 86.839,-13.198 ; 85.02,-55.62 ccw(c86.868,-55.62) 86.868,-57.468 86.868,-36.468 ; 85.02,-32.379 ccw(c86.868,-32.379) 86.868,-34.227 86.868,-13.227 ; 90.875,-68.7 ccw(c90.875,-67.582) 91.993,-67.582 ; 90.882,-2 cw(c90.882,-3.118) 92,-3.118 ; 22.098,-62.103 cw(c23.946,-62.103) 23.946,-60.255 49.25,-60.255 cw(c49.25,-62.103) 51.098,-62.103 22.098,-62.103 ; 22.352,-8.822 ccw(c24.2,-8.822) 24.2,-10.67 49.504,-10.67 ccw(c49.504,-8.822) 51.352,-8.822 22.352,-8.822 ; 53.173,-62.103 cw(c55.021,-62.103) 55.021,-60.255 80.325,-60.255 cw(c80.325,-62.103) 82.173,-62.103 53.173,-62.103 ; 53.427,-8.822 ccw(c55.275,-8.822) 55.275,-10.67 80.579,-10.67 ccw(c80.579,-8.822) 82.427,-8.822 53.427,-8.822